# Altium PCB HIVE_SIGHT_PANEL_OLD.PcbDoc
Units mil, origin at the board's own origin, x right, y up, seen from the top; angles counter-clockwise.
Board outline 7000 x 5246.04 mil, 4 copper layers (Top, GND, PWR, Bottom), stack 60.394 mil thick; 8 components, 55 nets, 6 pads, 0 vias.
Unrouted connection lines stored in the file: 24.
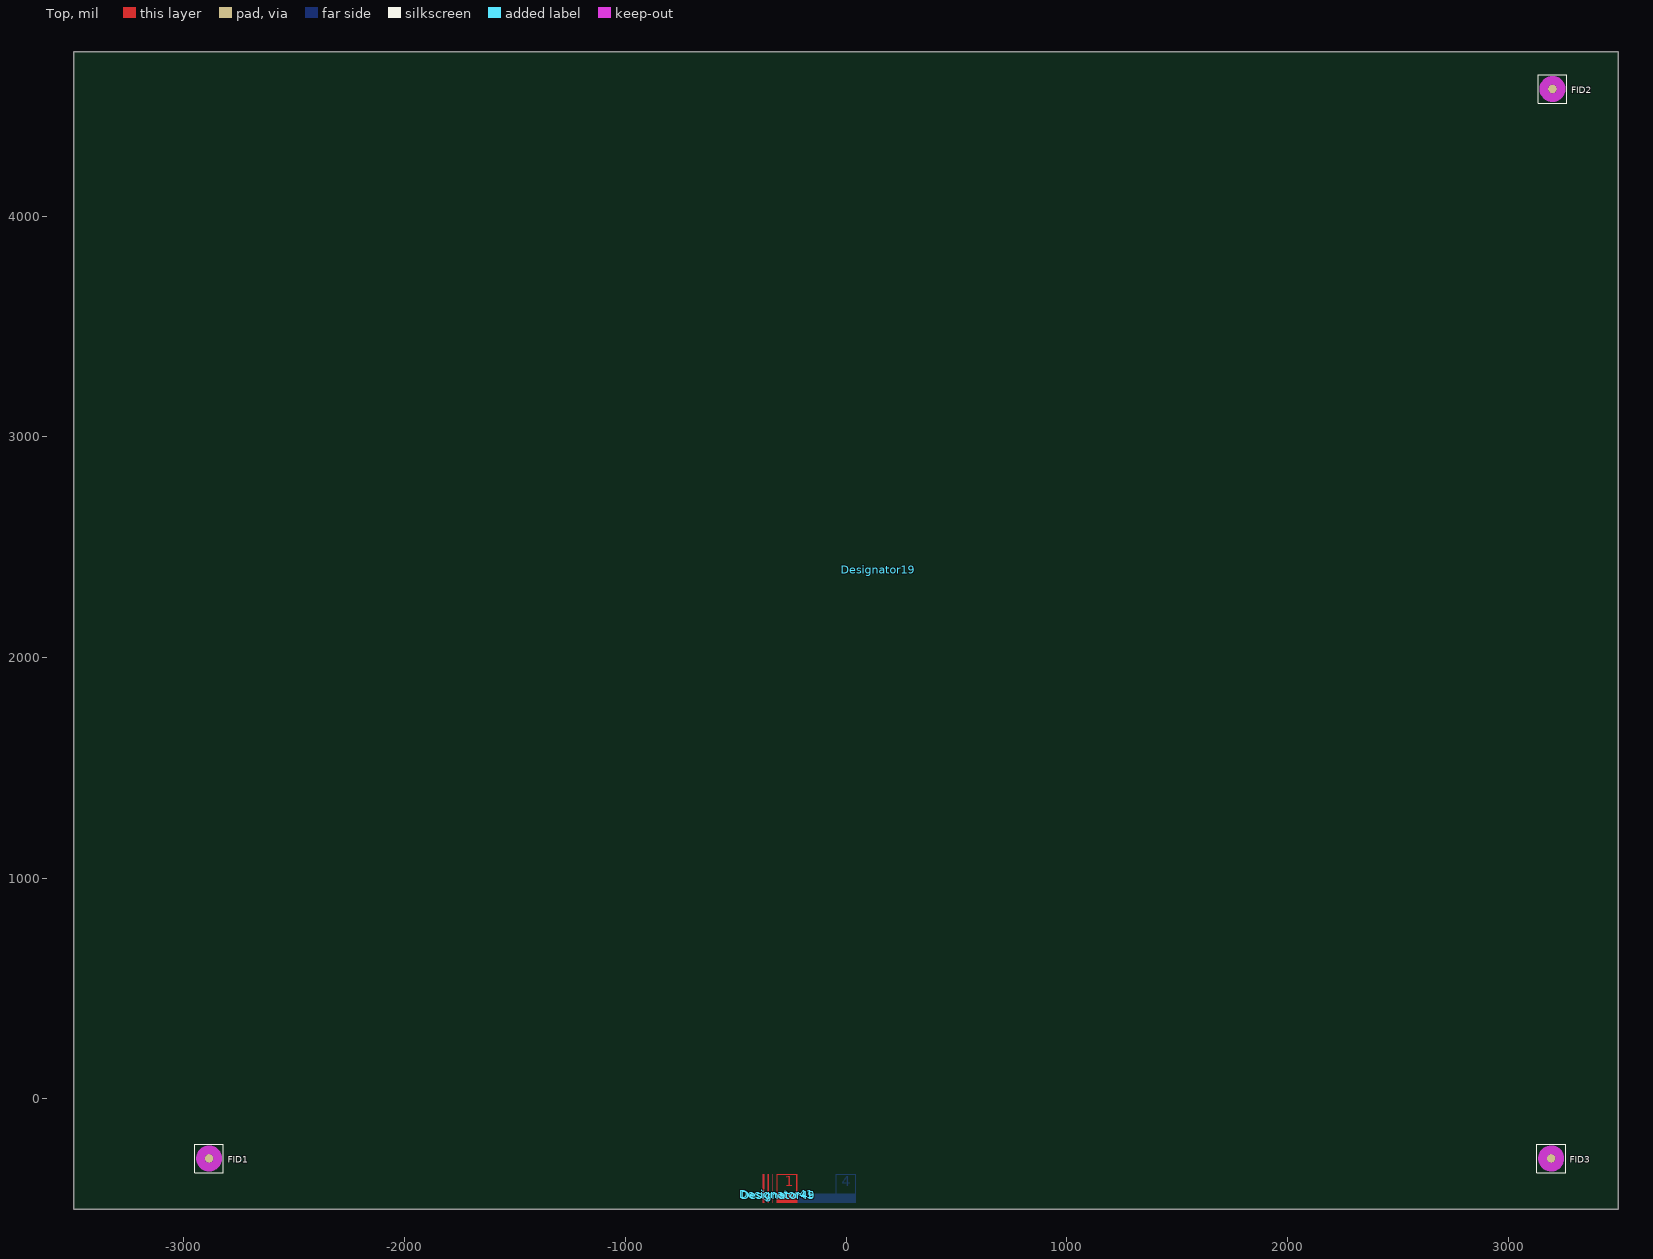
[diagram p0: Top view]
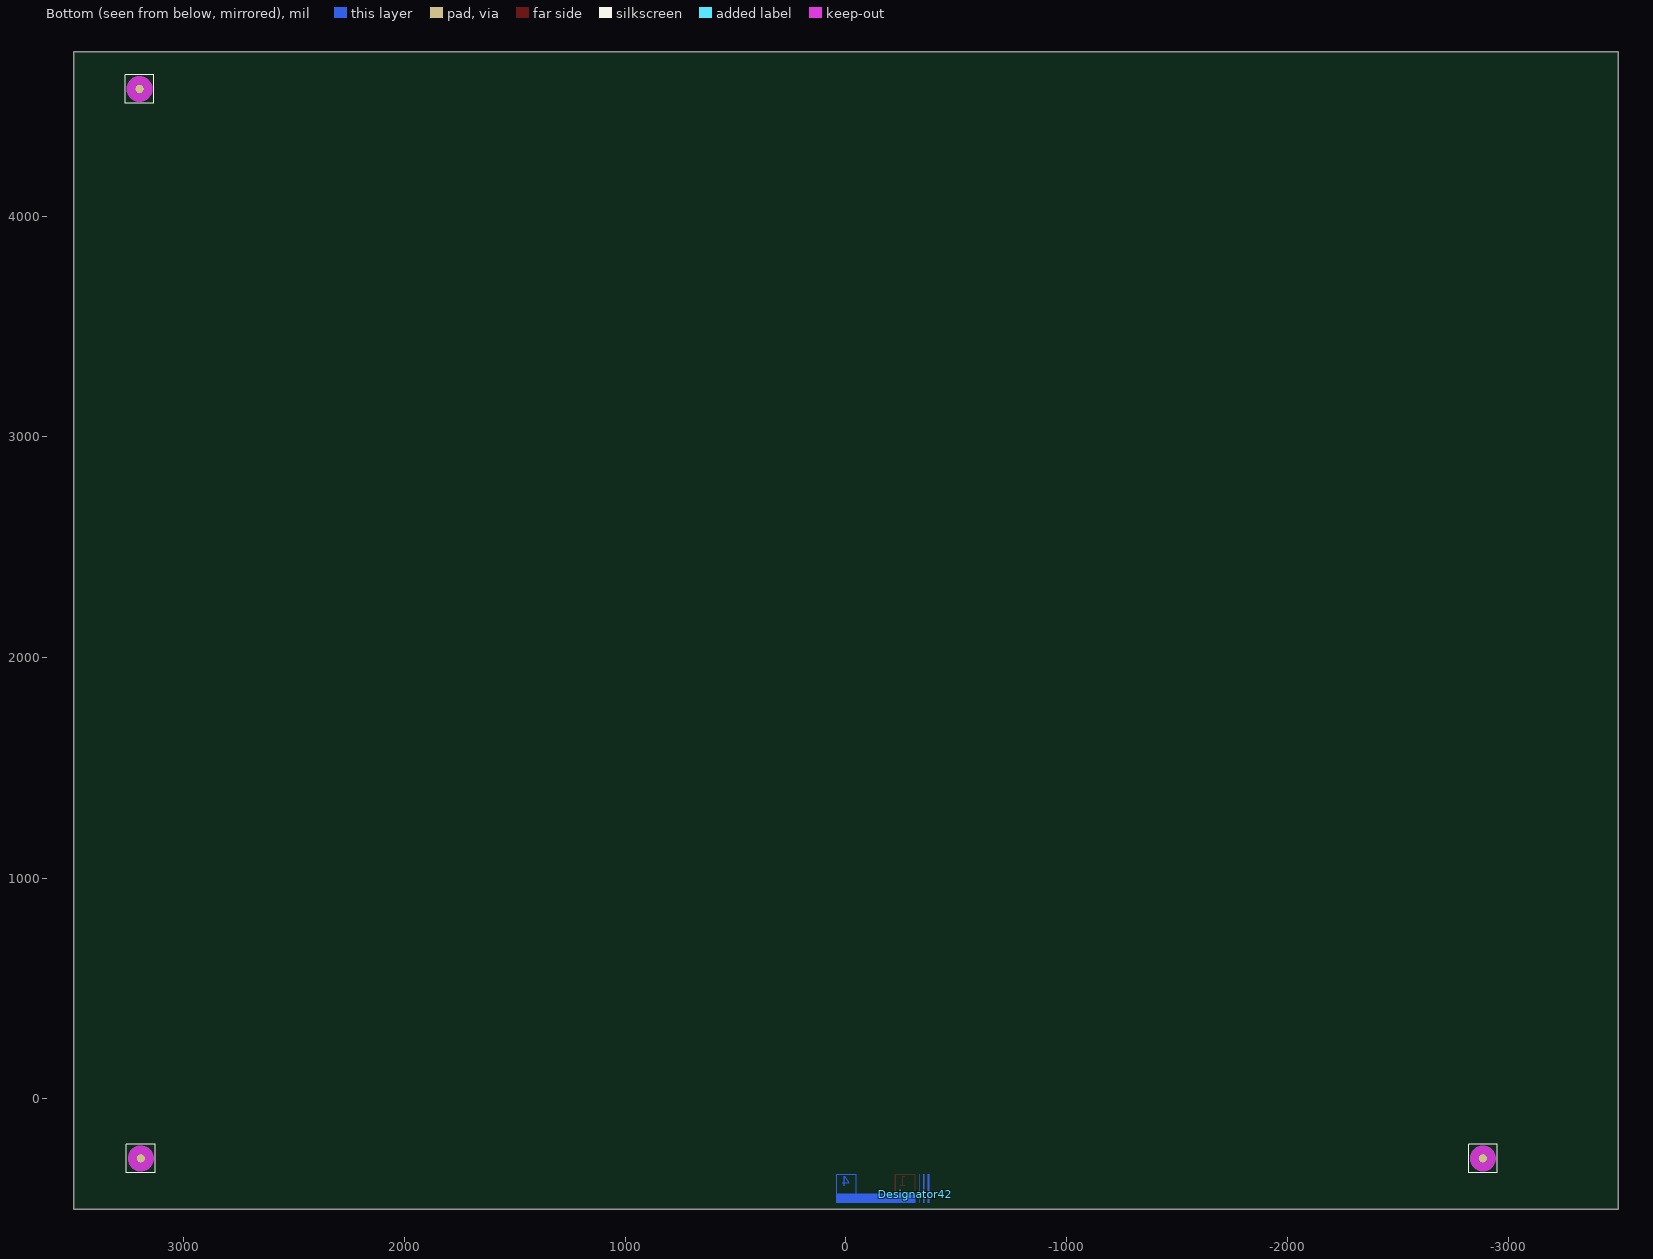
[diagram p1: Bottom view, seen from below]
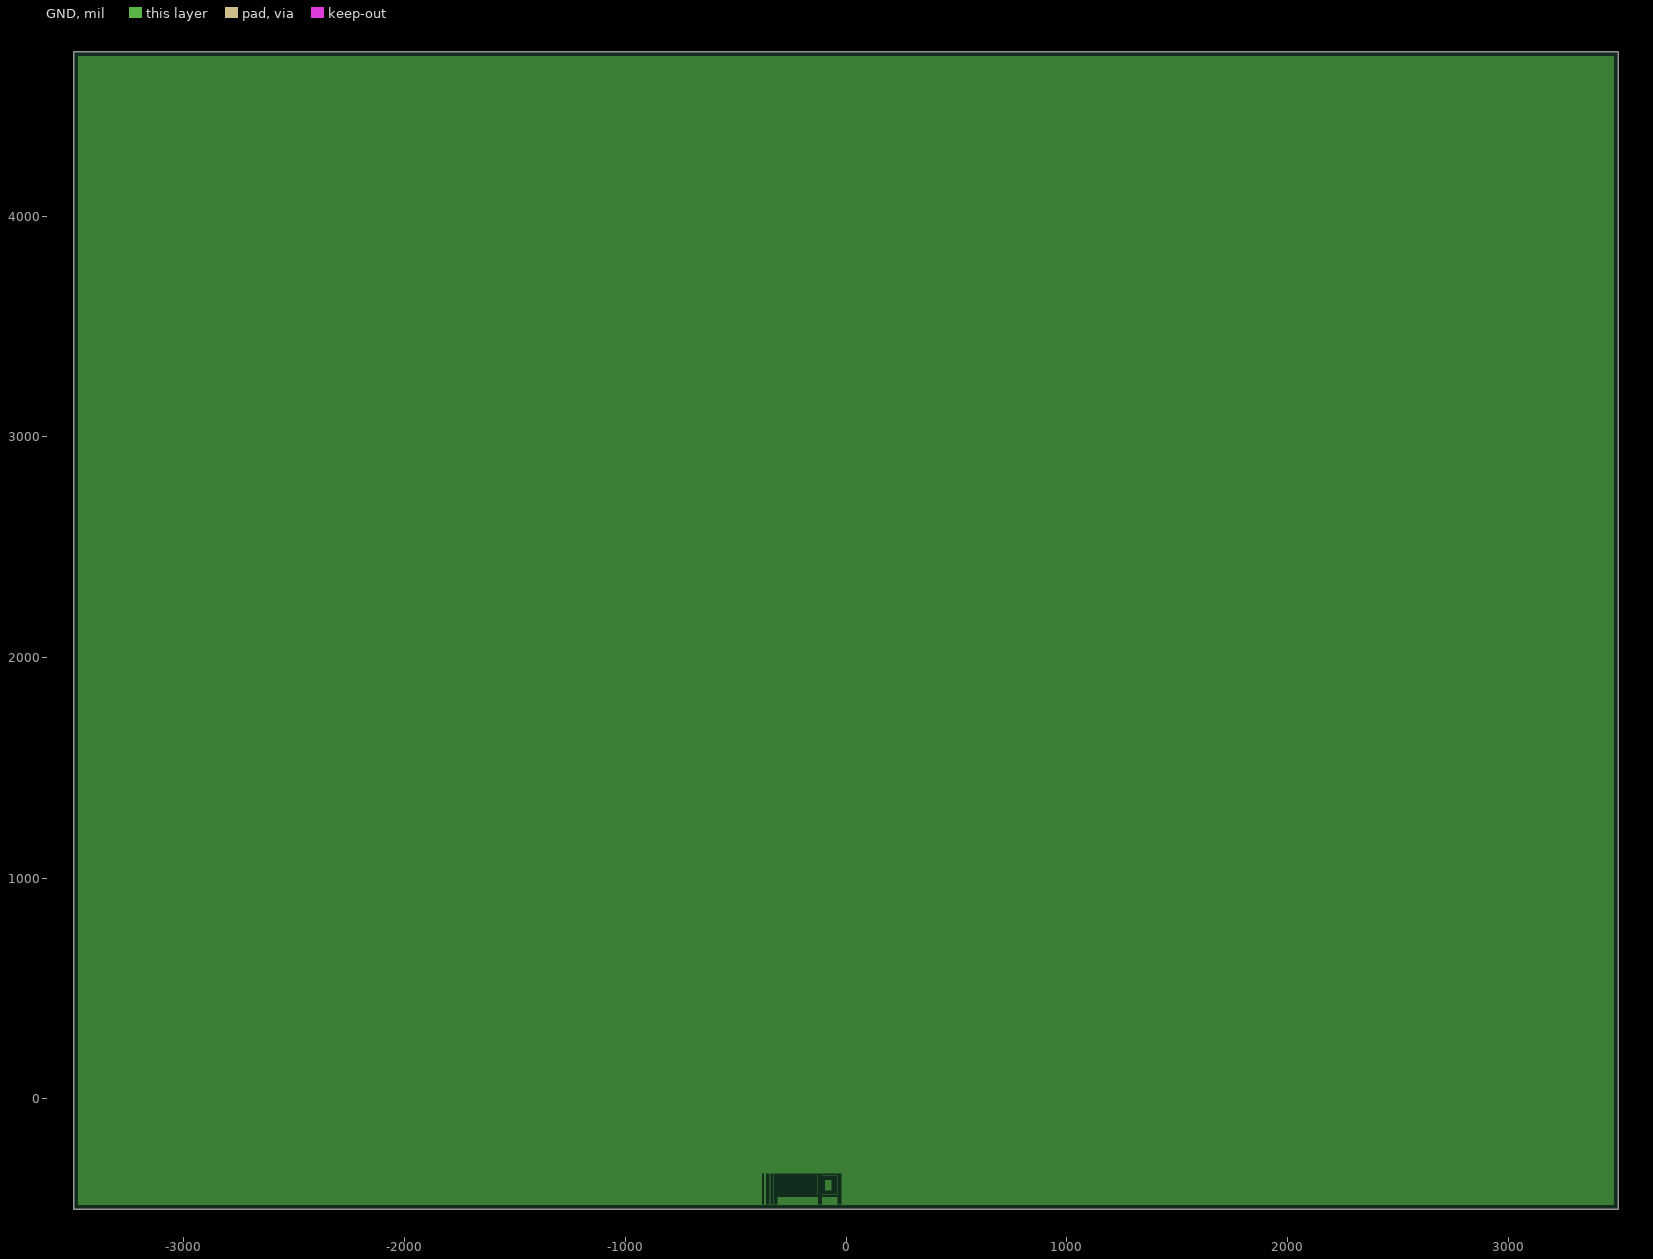
[diagram p2: GND, clearances drawn from the general rule]
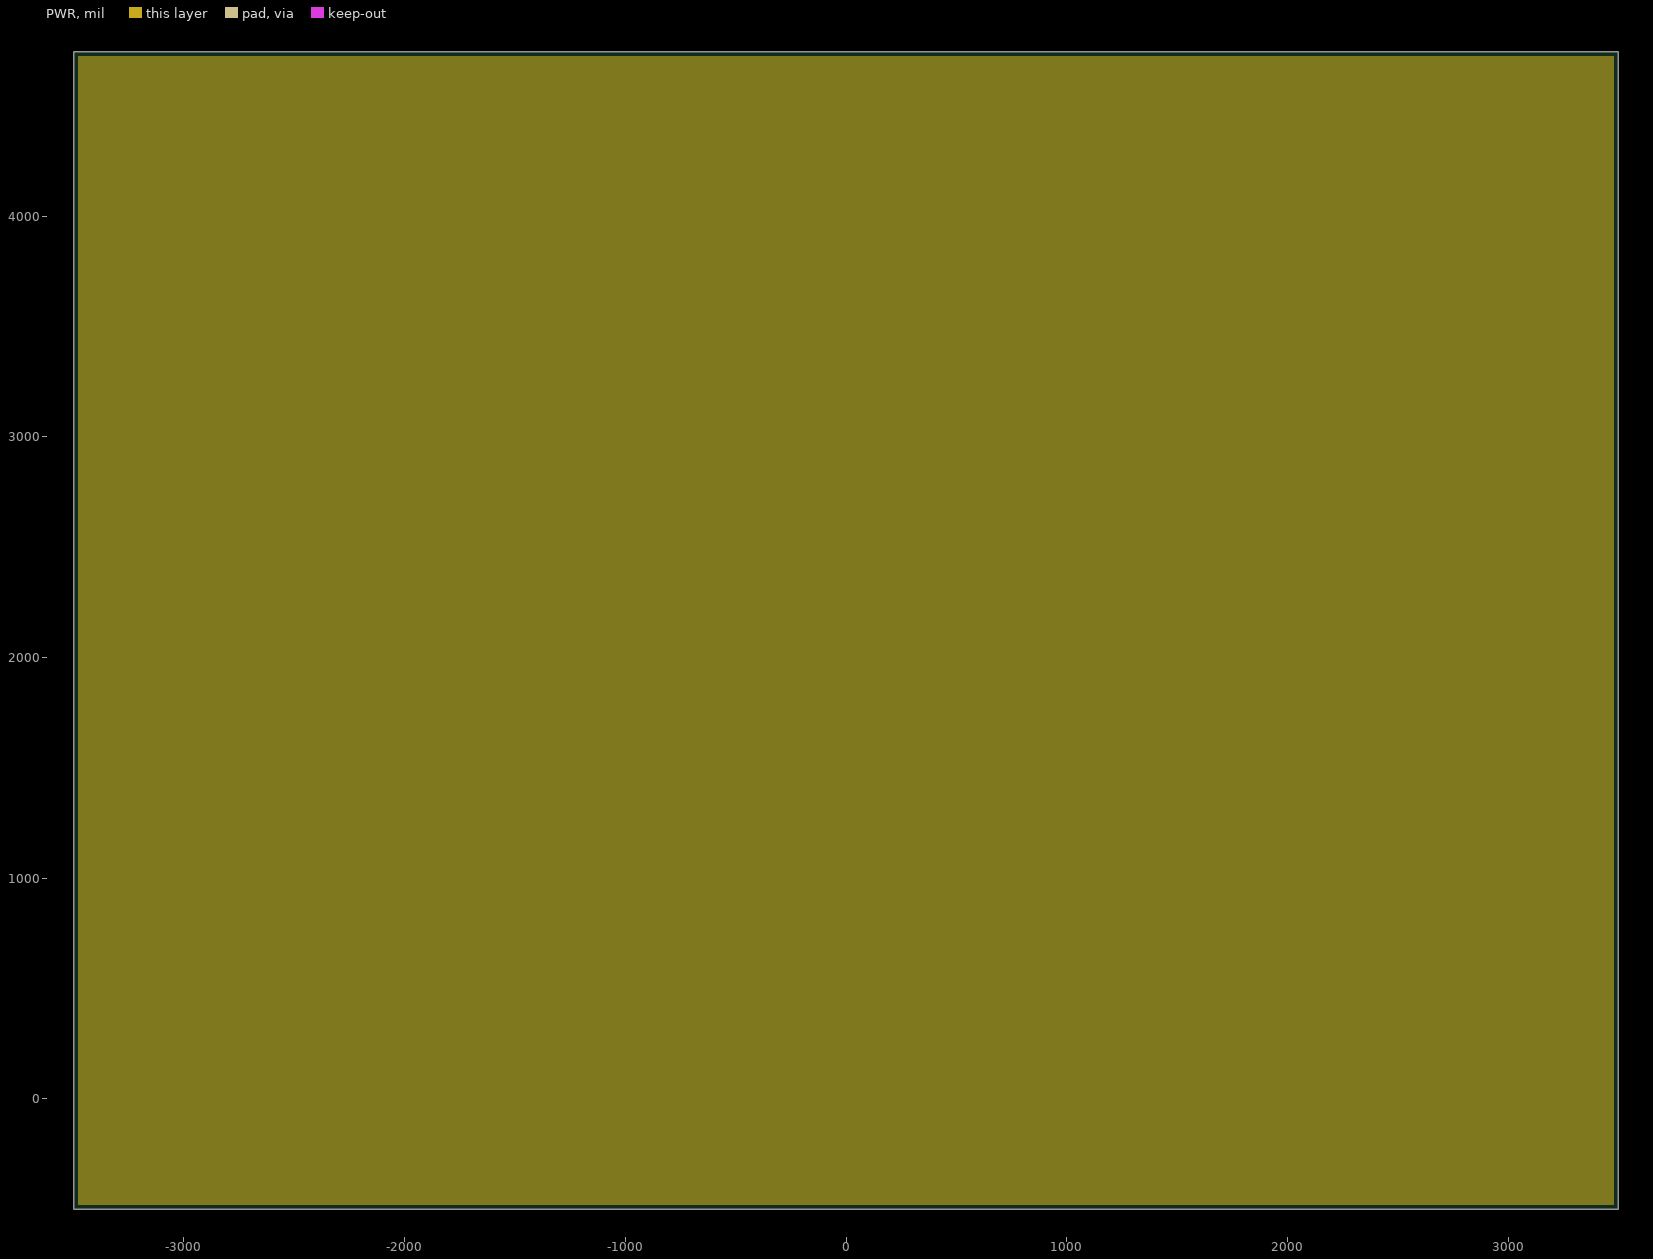
[diagram p3: PWR, clearances drawn from the general rule]

## Layer stack, top to bottom
Top Solder: solder mask 1.2205, Dk 3.5
Top: signal copper 1.378
Dielectric 1: prepreg 4.803, Dk 4.1
GND: plane copper 1.378, net GND
Dielectric 2: core 45.276, Dk 4.1
PWR: plane copper 1.378, net GND
Dielectric 3: prepreg 4.803, Dk 4.1
Bottom: signal copper 1.378
Bottom Solder: solder mask 0.394, Solder Resist, Dk 3.5

## Board outline
-3500,-500 3500,-500 3500,4746.04 -3500,4746.04

## Design rules (kind name [scope] priority, off if disabled: settings)
BoardOutlineClearance BoardOutlineClearance-Silk [(OnLayer('Bottom Overlay')) OR (OnLayer('Top Overlay'))] p1: gap=0 ignorepadtopadclearanceinfootprint=FALSE
BoardOutlineClearance BoardOutlineClearance-MouseBites [InComponentClass('MouseBites')] p2: gap=10 ignorepadtopadclearanceinfootprint=FALSE except(0: Arc-SplitContinuation Track-SplitContinuation SMDPad-SplitContinuation THPad-OutlineEdge THPad-CavityEdge THPad-CutoutEdge THPad-SplitBarrior THPad-SplitContinuation Via-SplitContinuation Fill-SplitContinuation Poly-SplitContinuation Region-OutlineEdge Region-CavityEdge Region-CutoutEdge Region-SplitBarrior Region-SplitContinuation Text-SplitContinuation; 20: Arc-OutlineEdge Track-OutlineEdge SMDPad-OutlineEdge Via-OutlineEdge Fill-OutlineEdge Poly-OutlineEdge Text-OutlineEdge)
BoardOutlineClearance BoardOutlineClearance-EdgePlating [InPolygonClass('EdgePlatingPolygon')] p3: gap=0 ignorepadtopadclearanceinfootprint=FALSE
BoardOutlineClearance [All] p4: gap=10 ignorepadtopadclearanceinfootprint=FALSE except(0: Arc-SplitContinuation Track-SplitContinuation SMDPad-SplitContinuation THPad-SplitContinuation Via-SplitContinuation Fill-SplitContinuation Poly-SplitContinuation Region-SplitContinuation Text-SplitContinuation; 15: THPad-OutlineEdge; 20: Arc-OutlineEdge Track-OutlineEdge SMDPad-OutlineEdge Via-OutlineEdge Fill-OutlineEdge Poly-OutlineEdge Region-OutlineEdge Text-OutlineEdge)
Clearance HV-Header [(TouchesRoom('SB_HDR_HV_1') OR TouchesRoom('SB_HDR_HV_2') OR TouchesRoom('DB_HDR_HV_1') OR TouchesRoom('DB_HDR_HV_2') OR TouchesRoom('DB_HDR_HV_3') OR TouchesRoom('DB_HDR_HV_4')) AND OnTopLayer] p1: gap=7.87 ignorepadtopadclearanceinfootprint=FALSE
Clearance HV-External [InNetClass('HV') vs OnOutside] p2: gap=32 ignorepadtopadclearanceinfootprint=FALSE
Clearance HV-Internal [InNetClass('HV') vs OnMid] p3: gap=10 ignorepadtopadclearanceinfootprint=FALSE
Clearance 250V-External [InNet('-HV_MID') vs OnOutside] p4: gap=16 ignorepadtopadclearanceinfootprint=FALSE
Clearance 250V-Internal [InNet('-HV_MID') vs OnMid] p5: gap=8 ignorepadtopadclearanceinfootprint=FALSE
Clearance [All] p6: gap=5 ignorepadtopadclearanceinfootprint=FALSE
Clearance DiffPair [InNetClass('HighSpeedDiff')] p7: gap=12 ignorepadtopadclearanceinfootprint=FALSE except(5: Arc-Via Track-Via)
Clearance DiffPair_Same [InNetClass('HighSpeedDiff') vs InNetClass('HighSpeedDiff')] p8 off: gap=12 ignorepadtopadclearanceinfootprint=FALSE except(5: Arc-Via Track-Via)
ComponentClearance "Schematic Power Plane Clearance" [InComponent('MB1')] p1: gap=0 collisioncheckmode=3 verticalgap=0 showdistances=FALSE
ComponentClearance "Schematic Power Plane Clearance_1" [InComponent('MB2')] p2: gap=0 collisioncheckmode=3 verticalgap=0 showdistances=FALSE
ComponentClearance "Schematic Power Plane Clearance_2" [InComponent('MB3')] p3: gap=0 collisioncheckmode=3 verticalgap=0 showdistances=FALSE
ComponentClearance [All] p4: gap=4 collisioncheckmode=3 verticalgap=4 showdistances=FALSE
DiffPairsRouting [All] p1: maxlimit=8 minlimit=8 mostfreqgap=8 toplayer_minwidth=6 toplayer_maxwidth=6 toplayer_prefwidth=6 bottomlayer_minwidth=6 bottomlayer_maxwidth=6 bottomlayer_prefwidth=6 maxuncoupledlength=500
HoleSize [All] p1: absolutevalues=TRUE maxlimit=1000 minlimit=4 maxpercent=80.000 minpercent=20.000
HoleToHoleClearance [All] p1: gap=5 allowstackedmicrovias=TRUE
MatchedLengths DiffMatching_WithinPair [InDifferentialPairClass('All Differential Pairs')] p1: tolerance=1 checknetsindiffpair=TRUE checkdiffpairvsdiffpair=FALSE checkxsignals=FALSE checkothers=FALSE
MatchedLengths DiffMatching [InDifferentialPairClass('All Differential Pairs')] p2: tolerance=1 checknetsindiffpair=FALSE checkdiffpairvsdiffpair=TRUE checkxsignals=TRUE checkothers=TRUE
MinimumSolderMaskSliver [All] p1: minsoldermaskwidth=3.9
PlaneClearance [All] p1: clearance=6
PlaneConnect [All] p1: pad.planeconnectstyle=Relief pad.reliefexpansion=20 pad.reliefentries=4 pad.reliefconductorwidth=10 pad.reliefairgap=10 via.planeconnectstyle=Direct via.reliefexpansion=20 via.reliefentries=4 via.reliefconductorwidth=10 via.reliefairgap=10
PolygonConnect [All] p1: thpad.connectstyle=Relief thpad.reliefconductorwidth=10 thpad.reliefentries=4 thpad.polygonreliefangle="90 Angle" thpad.airgapwidth=10 smdpad.connectstyle=Direct smdpad.reliefconductorwidth=10 smdpad.reliefentries=4 smdpad.polygonreliefangle="90 Angle" smdpad.airgapwidth=10 via.connectstyle=Direct via.reliefconductorwidth=10 via.reliefentries=4 via.polygonreliefangle="90 Angle" via.airgapwidth=10
RoutingVias [All] p1: holewidth=10 width=18 viastyle="Through Hole" minholewidth=10 minwidth=18 maxholewidth=10 maxwidth=30
SilkToSilkClearance [All] p1: silktosilkclearance=1
SilkToSolderMaskClearance [IsPad] p1: minsilkscreentomaskgap=1.35 clearancetoexposedcopper=FALSE
SolderMaskExpansion [All] p1: expansion=2 istentingtop=FALSE
Width [All] p1: maxlimit=1000 minlimit=4 preferedwidth=6
21 further rules are at their usual default settings.

## Classes and differential pairs
net class HighSpeedDiff: M1_CLK_N M1_CLK_P M1_CMD_IN_N M1_CMD_IN_P M1_CMD_OUT_N M1_CMD_OUT_P M1_HSL_N M1_HSL_P M1_SYNC_N M1_SYNC_P M2_CLK_N M2_CLK_P M2_CMD_IN_N M2_CMD_IN_P M2_CMD_OUT_N M2_CMD_OUT_P M2_HSL_N M2_HSL_P M2_SYNC_N M2_SYNC_P
net class HV: -HV M1_SOURCE_-HV_A M1_SOURCE_-HV_B M2_SOURCE_-HV_A M2_SOURCE_-HV_B
differential pair M2_SYNC: +M2_SYNC_P -M2_SYNC_N
differential pair M2_HSL: +M2_HSL_P -M2_HSL_N
differential pair M2_CMD_OUT: +M2_CMD_OUT_P -M2_CMD_OUT_N
differential pair M2_CMD_IN: +M2_CMD_IN_P -M2_CMD_IN_N
differential pair M2_CLK: +M2_CLK_P -M2_CLK_N
differential pair M1_SYNC: +M1_SYNC_P -M1_SYNC_N
differential pair M1_HSL: +M1_HSL_P -M1_HSL_N
differential pair M1_CMD_OUT: +M1_CMD_OUT_P -M1_CMD_OUT_N
differential pair M1_CMD_IN: +M1_CMD_IN_P -M1_CMD_IN_N
differential pair M1_CLK: +M1_CLK_P -M1_CLK_N

## Components (designator, comment, footprint, x,y, rotation, side; value= is the part's Value field where it differs from the comment)
Designator19 "Comment" STN_STENCIL_TOP_FRAMEWORK_420X520MM 146.97,2398.02 r0 top
Designator41 "Comment" LYR-MARKER-SIGNAL-1 -314.38,-432.4 r0 top
Designator42 "Comment" LYR-MARKER-SIGNAL-4 -314.38,-432.4 r0 bottom
Designator45 "Comment" LYR-MARKER-PLANE-2 -307.57,-437.32 r0 top
Designator49 "Comment" LYR-MARKER-PLANE-3 -307.57,-437.32 r0 top
FID1 "Comment" "FID_CIRCLE_1MM - PASTE_MASK" -2886.14,-269.42 r180 top
FID2 "Comment" "FID_CIRCLE_1MM - PASTE_MASK" 3201.16,4576.59 r180 top
FID3 "Comment" "FID_CIRCLE_1MM - PASTE_MASK" 3195.49,-269.42 r180 top

## Footprints (in the part's own frame and the unit in brackets; to place one, negate y for a bottom-side part, rotate by r counter-clockwise, add the part's x,y. Pads: shape width x height; smd on the part's side, far side on the other; paste and mask are expansions set on the pad)
"FID_CIRCLE_1MM - PASTE_MASK" [mm]
  round 1 smd paste-1 mask+1: 1(0,0)
  round 1 smd far side paste-1 mask+1: 2(0,0)
  Top keep-out circle w1: c0,0 r1
  Bottom keep-out circle w1: c0,0 r1
  silkscreen extent -1.65,-1.65 1.65,1.65
LYR-MARKER-PLANE-2 [mil]
  GND region: 187.01,-4.92 187.01,0 83.66,0 83.66,-4.92
  GND region: 83.66,-4.92 88.58,-4.92 88.58,98.43 83.66,98.43
  GND region: 93.5,21.73 93.5,4.92 177.16,4.92 177.16,21.73
  GND region: 177.17,72.06 177.17,88.58 93.5,88.58 93.5,72.06
  GND region: 93.5,4.92 122.18,4.92 122.18,88.58 93.5,88.58
  GND region: 187.01,93.5 187.01,98.43 83.66,98.43 83.66,93.5
  GND region: 182.09,-39.37 196.85,-39.37 196.85,98.43 182.09,98.43
  GND region: -4.92,-4.92 88.58,-4.92 88.58,98.43 -4.92,98.43
  GND region: -17.68,-39.37 -4.92,-39.37 -4.92,98.42 -17.68,98.42
  GND region: -34.4,-39.37 -21.68,-39.37 -21.68,98.42 -34.4,98.42
  GND region: -54.06,-39.37 -40.4,-39.37 -40.4,98.42 -54.06,98.42
  GND region: -70.87,-39.37 -64.06,-39.37 -64.06,98.42 -70.87,98.42
  GND region: 177.17,88.58 154.46,88.58 154.46,4.92 177.17,4.92
LYR-MARKER-PLANE-3 [mil]
  GND region: 270.67,-39.37 285.43,-39.37 285.43,98.43 270.67,98.43
  GND region: 172.24,-4.92 177.17,-4.92 177.17,98.43 172.24,98.43
  GND region: 83.66,-4.92 88.58,-4.92 88.58,98.43 83.66,98.43
  GND region: 275.59,93.5 275.59,98.43 172.24,98.43 172.24,93.5
  GND region: 182.09,4.92 210.85,4.92 210.85,88.58 182.09,88.58
  GND region: 265.75,72.06 265.75,88.58 182.09,88.58 182.09,72.06
  GND region: 265.75,88.58 243.65,88.58 243.65,4.92 265.75,4.92
  GND region: 182.09,21.73 182.09,4.92 265.75,4.92 265.75,21.73
  GND region: 275.59,-4.92 275.59,0 172.24,0 172.24,-4.92
  GND region: -4.92,-4.92 173.21,-4.92 173.21,98.43 -4.92,98.43
  GND region: -70.87,-39.37 -64.06,-39.37 -64.06,98.42 -70.87,98.42
  GND region: -54.06,-39.37 -40.4,-39.37 -40.4,98.42 -54.06,98.42
  GND region: -34.4,-39.37 -21.68,-39.37 -21.68,98.42 -34.4,98.42
  GND region: -17.68,-39.37 -4.92,-39.37 -4.92,98.42 -17.68,98.42
LYR-MARKER-SIGNAL-1 [mil]
  Top region: 88.58,0 93.5,0 93.5,93.5 88.58,93.5
  Top region: 0,4.92 0,-39.37 93.5,-39.37 93.5,4.92
  Top region: 93.5,93.5 88.58,93.5 88.58,0 93.5,0
  Top region: 93.5,88.58 93.5,93.5 0,93.5 0,88.58
  Top region: 0,0 4.92,0 4.92,93.5 0,93.5
  Top region: -64.06,-39.37 -54.06,-39.37 -54.06,93.5 -64.06,93.5
  Top region: -40.4,-39.37 -34.4,-39.37 -34.4,93.5 -40.4,93.5
  Top region: -21.68,-39.37 -17.68,-39.37 -17.68,93.5 -21.68,93.5
  Top pour cut-out: -74.8,98.43 -74.8,-39.37 98.42,-39.37 98.43,98.43
LYR-MARKER-SIGNAL-4 [mil]
  Top region: -64.05,39.37 -54.05,39.37 -54.05,-93.5 -64.05,-93.5
  Top region: -40.4,39.37 -34.4,39.37 -34.4,-93.5 -40.4,-93.5
  Top region: -21.68,39.37 -17.68,39.37 -17.68,-93.5 -21.68,-93.5
  Top region: 270.67,-93.5 265.75,-93.5 265.75,0 270.67,0
  Top region: 0,-4.92 0,39.37 359.25,39.37 359.25,-4.92
  Top region: 359.25,-93.5 354.33,-93.5 354.33,0 359.25,0
  Top region: 359.25,-88.58 359.25,-93.5 265.75,-93.5 265.75,-88.58
  Top region: 354.33,0 359.25,0 359.25,-93.5 354.33,-93.5
  Top pour cut-out: -70.87,-98.43 -70.87,39.37 364.17,39.37 364.17,-98.43
STN_STENCIL_TOP_FRAMEWORK_420X520MM [mil] "MEC - STENCIL PASTE FRAMEWORK"
  body extent -10236,-8268 -10157,-8189

## Nets (pads, with @x,y where several pads share a name; then routed paths per layer and width w, separated by ;. In a path a pad name is that pad's centre, name@x,y a point inside that pad or via, vN(x,y) a via of type N, cw(c..) or ccw(c..) an arc to the next point about the centre after c; other vN are vias at no path point)
2V5: 
-HV: 
-HV_MID: 
ADAPTER_BOARD_ID: 
GND: 
M1_1V8_A_LDO_IN: 
M1_1V8_A_LDO_OUT: 
M1_1V8_ANALOG: 
M1_1V8_D_LDO_IN: 
M1_1V8_D_LDO_OUT: 
M1_1V8_DIGITAL: 
M1_CLK_N: 
M1_CLK_P: 
M1_CMD_IN_N: 
M1_CMD_IN_P: 
M1_CMD_OUT_N: 
M1_CMD_OUT_P: 
M1_DRAIN_PI_A: 
M1_DRAIN_PI_B: 
M1_GRILLE_PI_A: 
M1_GRILLE_PI_B: 
M1_HSL_N: 
M1_HSL_P: 
M1_RST: 
M1_SORTIE_PI_A: 
M1_SORTIE_PI_B: 
M1_SOURCE_-HV_A: 
M1_SOURCE_-HV_B: 
M1_SYNC_N: 
M1_SYNC_P: 
M2_1V8_A_LDO_IN: 
M2_1V8_A_LDO_OUT: 
M2_1V8_ANALOG: 
M2_1V8_D_LDO_IN: 
M2_1V8_D_LDO_OUT: 
M2_1V8_DIGITAL: 
M2_CLK_N: 
M2_CLK_P: 
M2_CMD_IN_N: 
M2_CMD_IN_P: 
M2_CMD_OUT_N: 
M2_CMD_OUT_P: 
M2_DRAIN_PI_A: 
M2_DRAIN_PI_B: 
M2_GRILLE_PI_A: 
M2_GRILLE_PI_B: 
M2_HSL_N: 
M2_HSL_P: 
M2_RST: 
M2_SORTIE_PI_A: 
M2_SORTIE_PI_B: 
M2_SOURCE_-HV_A: 
M2_SOURCE_-HV_B: 
M2_SYNC_N: 
M2_SYNC_P: 
pads on no net: FID1.1 FID1.2 FID2.1 FID2.2 FID3.1 FID3.2

## Polygon pours and split planes (outlines as drawn)
M2_SOURCE_-HV_B on Top "Top-M2_SOURCE_-HV_B 1" (solid, pour order 86): 804.43,744.95
no net on Top "Top-No Net" (solid, pour order 50): 1172.15,1708.94
no net on Top "Top-No Net 1" (solid, pour order 44): 1144.62,1731.39
no net on Top "Top-No Net 2" (solid, pour order 42): 1152.12,1746.17
no net on Top "Top-No Net 3" (solid, pour order 40): 1148.4,1730.43
no net on Top "Top-No Net 4" (solid, pour order 38): 1253.54,2169.25
no net on Top "Top-No Net 5" (solid, pour order 36): 1257.26,2184.99
no net on Top "Top-No Net 6" (solid, pour order 34): 1249.76,2170.21
no net on Top "Top-No Net 7" (solid, pour order 28): 1277.29,2147.76
no net on Top "Top-No Net 8" (solid, pour order 22): 1277.29,1708.94
no net on Top "Top-No Net 9" (solid, pour order 14): 1249.76,1731.39
no net on Top "Top-No Net 10" (solid, pour order 8): 1257.26,1746.17
no net on Top "Top-No Net 11" (solid, pour order 2): 1253.54,1730.43
no net on Top "Top-No Net 12" (solid, pour order 0): -905.31,-122.26
GND on GND (split plane): -125.48,-415.59 -125.48,-432.4 -125.48,-437.32 -130.4,-437.32 -130.4,-432.4 -130.4,-348.74 -130.4,-343.81 -125.48,-343.81
GND on GND (split plane): -36.9,-437.32 -110.72,-437.32 -110.72,-432.4 -41.82,-432.4 -41.82,-348.74 -110.72,-348.74 -110.72,-343.81 -36.9,-343.81
GND on GND (split plane): 3479.9,-479.9 -3479.9,-479.9 -3479.9,4725.94 3479.9,4725.94
GND on PWR (split plane): 3479.9,-479.9 -3479.9,-479.9 -3479.9,4725.94 3479.9,4725.94

## Other copper
Top:
  text "LAYER 1: TOP" at 10897.52,5333.21 h100
Bottom:
  text "LAYER 8: BOTTOM" at 10897.52,4136.93 h100
GND (plane layer: these items are gaps in the copper):
  text "LAYER 2: GND1" at 10897.52,5162.31 h100
PWR (plane layer: these items are gaps in the copper):
  text "LAYER 6: GND3" at 10897.52,4478.72 h100

## Silkscreen, mask and mechanical layers (free items; w line width, h text height)
Top Overlay:
  text "TOP SILKSCREEN" at 10897.52,5675 h100
Bottom Overlay:
  text "BOTTOM SILKSCREEN" at 10897.52,3795.14 h100
Top Paste:
  text "TOP PASTEMASK" at 10897.52,2402.64 h100
Bottom Paste:
  text "BOTTOM PASTEMASK" at 10897.52,1354.98 h100
Top Solder:
  text "TOP SOLDERMASK" at 10897.52,5504.1 h100
Bottom Solder:
  text "BOTTOM SOLDERMASK" at 10897.52,3966.04 h100
Top Assembly:
  text "TOP ASSEMBLY" at 10897.52,2228.85 h100
Bottom Assembly:
  text "BOTTOM ASSEMBLY" at 10897.52,1186.51 h100
Top Designators:
  text "TOP DESIGNATORS" at 10897.52,2060.38 h100
Bottom Designators:
  text "BOTTOM DESIGNATORS" at 10897.52,849.57 h100
Board Outline:
  text "BOARD OUTLINE" at 10897.52,3371.19 h100
Panel Outline:
  the board outline again, w5
  text "PANEL OUTLINE" at 10897.52,3202.72 h100
Route Tool Path:
  lines w100: -475,-500 475,-500
  text "100 MIL ROUTER" at -4152.61,3899.19 h78.74
  text "100 MIL ROUTER" at 3563.92,3896.69 h78.74
  text "ROUTE TOOL PATH" at 10897.52,3034.25 h100
  text "100 MIL ROUTER" at 3576.84,213.49 h78.74
  text "100 MIL ROUTER" at -4201.92,144.59 h78.74
Panel V-Grove:
  lines w5: -3750,0 3750,0 ; -3750,4246.04 3750,4246.04
  text "V-GROOVE" at 3839.85,4189.61 h78.74
  text "V-GROOVE" at -4426.76,4188.23 h78.74
  text "PANEL V-GROOVE" at 10897.52,2865.78 h100
  text "V-GROOVE" at 3845.84,-42 h78.74
  text "V-GROOVE" at -4420.76,-43.38 h78.74
Manufacturing Notes:
  text "MANUFACTURING NOTES" at 10897.52,512.64 h100
Top 3D Models:
  text "TOP 3D MODELS" at 10897.52,1723.44 h100
Bottom 3D Models:
  text "BOTTOM 3D MODELS" at 10897.52,681.1 h100
Top Courtyard:
  text "TOP COURTYARD" at 10897.52,1891.91 h100
Bottom Courtyard:
  text "BOTTOM COURTYARD" at 10897.52,1018.04 h100
Drill Drawing:
  drawing of 152 lines, arcs and shapes, not listed
  text "Symbol" at 13310.53,2742.63 h72
  text "Count" at 13816.41,2742.63 h72
  text "Hole Size" at 14466.23,2742.63 h72
  text "Plated" at 15675.88,2742.63 h72
  text "Hole Type" at 16181.75,2742.63 h72
  text "Drill Layer Pair" at 16915.55,2742.63 h72
  text "Via/Pad" at 18105.21,2742.63 h72
  text "Pad Shape" at 18695.06,2742.63 h72
  text "DRILL DRAWING" at 10897.52,2717.67 h100
  text "4" at 13816.41,2592.63 h60
  text "19.685mil (0.500mm)" at 14466.23,2592.63 h60
  text "PTH" at 15675.88,2592.63 h60
  text "Slot" at 16181.75,2592.63 h60
  text "Top - Bottom" at 16915.55,2592.63 h60
  text "Pad" at 18105.21,2592.63 h60
  text "Rounded Rectangle" at 18695.06,2592.63 h60
  text "4" at 13816.41,2442.63 h60
  text "21.654mil (0.550mm)" at 14466.23,2442.63 h60
  text "PTH" at 15675.88,2442.63 h60
  text "Slot" at 16181.75,2442.63 h60
  text "Top - Bottom" at 16915.55,2442.63 h60
  text "Pad" at 18105.21,2442.63 h60
  text "Rounded Rectangle" at 18695.06,2442.63 h60
  text "4" at 13816.41,2292.63 h60
  text "40.000mil (1.016mm)" at 14466.23,2292.63 h60
  text "PTH" at 15675.88,2292.63 h60
  text "Round" at 16181.75,2292.63 h60
  text "Top - Bottom" at 16915.55,2292.63 h60
  text "Pad" at 18105.21,2292.63 h60
  text "(Mixed)" at 18695.06,2292.63 h60
  text "4" at 13816.41,2142.63 h60
  text "51.181mil (1.300mm)" at 14466.23,2142.63 h60
  text "PTH" at 15675.88,2142.63 h60
  text "Round" at 16181.75,2142.63 h60
  text "Top - Bottom" at 16915.55,2142.63 h60
  text "Pad" at 18105.21,2142.63 h60
  text "(Mixed)" at 18695.06,2142.63 h60
  text "4" at 13816.41,1992.63 h60
  text "70.866mil (1.800mm)" at 14466.23,1992.63 h60
  text "PTH" at 15675.88,1992.63 h60
  text "Round" at 16181.75,1992.63 h60
  text "Top - Bottom" at 16915.55,1992.63 h60
  text "Pad" at 18105.21,1992.63 h60
  text "Rounded" at 18695.06,1992.63 h60
  text "10" at 13816.41,1842.63 h60
  text "125.984mil (3.200mm)" at 14466.23,1842.63 h60
  text "NPTH" at 15675.88,1842.63 h60
  text "Round" at 16181.75,1842.63 h60
  text "Top - Bottom" at 16915.55,1842.63 h60
  text "Pad" at 18105.21,1842.63 h60
  text "Rounded" at 18695.06,1842.63 h60
  text "12" at 13816.41,1692.63 h60
  text "40.157mil (1.020mm)" at 14466.23,1692.63 h60
  text "PTH" at 15675.88,1692.63 h60
  text "Round" at 16181.75,1692.63 h60
  text "Top - Bottom" at 16915.55,1692.63 h60
  text "Pad" at 18105.21,1692.63 h60
  text "(Mixed)" at 18695.06,1692.63 h60
  text "16" at 13816.41,1542.63 h60
  text "62.992mil (1.600mm)" at 14466.23,1542.63 h60
  text "PTH" at 15675.88,1542.63 h60
  text "Round" at 16181.75,1542.63 h60
  text "Top - Bottom" at 16915.55,1542.63 h60
  text "Pad" at 18105.21,1542.63 h60
  text "Rounded" at 18695.06,1542.63 h60
  text "24" at 13816.41,1392.63 h60
  text "42.913mil (1.090mm)" at 14466.23,1392.63 h60
  text "PTH" at 15675.88,1392.63 h60
  text "Round" at 16181.75,1392.63 h60
  text "Top - Bottom" at 16915.55,1392.63 h60
  text "Pad" at 18105.21,1392.63 h60
  text "Rounded" at 18695.06,1392.63 h60
  text "70" at 13816.41,1242.63 h60
  text "10.000mil (0.254mm)" at 14466.23,1242.63 h60
  text "PTH" at 15675.88,1242.63 h60
  text "Round" at 16181.75,1242.63 h60
  text "Top - Bottom" at 16915.55,1242.63 h60
  text "(Mixed)" at 18105.21,1242.63 h60
  text "Rounded" at 18695.06,1242.63 h60
  text "488" at 13816.41,1092.63 h60
  text "39.370mil (1.000mm)" at 14466.23,1092.63 h60
  text "PTH" at 15675.88,1092.63 h60
  text "Round" at 16181.75,1092.63 h60
  text "Top - Bottom" at 16915.55,1092.63 h60
  text "Pad" at 18105.21,1092.63 h60
  text "(Mixed)" at 18695.06,1092.63 h60
  text "728" at 13816.41,942.63 h60
  text "11.811mil (0.300mm)" at 14466.23,942.63 h60
  text "PTH" at 15675.88,942.63 h60
  text "Round" at 16181.75,942.63 h60
  text "Top - Bottom" at 16915.55,942.63 h60
  text "Via" at 18105.21,942.63 h60
  text "Rounded" at 18695.06,942.63 h60
  text "1368 Total" at 13816.41,792.63 h60
  text "Symbol" at 13310.53,742.68 h72
  text "Symbol" at 13310.53,742.68 h72
  text "Symbol" at 13310.53,742.68 h72
  text "Count" at 13816.41,742.68 h72
  text "Count" at 13816.41,742.68 h72
  text "Count" at 13816.41,742.68 h72
  text "Hole Size" at 14250.31,742.68 h72
  text "Hole Size" at 14250.31,742.68 h72
  text "Hole Size" at 14250.31,742.68 h72
  text "Plated" at 14972.11,742.68 h72
  text "Plated" at 14972.11,742.68 h72
  text "Plated" at 14972.11,742.68 h72
  text "Hole Type" at 15477.99,742.68 h72
  text "Hole Type" at 15477.99,742.68 h72
  text "Hole Type" at 15477.99,742.68 h72
  text "Drill Layer Pair" at 16211.79,742.68 h72
  text "Drill Layer Pair" at 16211.79,742.68 h72
  text "Drill Layer Pair" at 16211.79,742.68 h72
  text "Via/Pad" at 17401.44,742.68 h72
  text "Via/Pad" at 17401.44,742.68 h72
  text "Via/Pad" at 17401.44,742.68 h72
  text "Pad Shape" at 17991.29,742.68 h72
  text "Pad Shape" at 17991.29,742.68 h72
  text "Pad Shape" at 17991.29,742.68 h72
  text "Slot definitions :" at 13310.53,647.65 h60
  text "Routed Path Length" at 14343.22,647.65 h60
  text "= Calculated from tool start centre position to tool end centre position." at 15445.89,647.65 h60
  text "Hole Length" at 14343.22,547.68 h60
  text "= Routed Path Length + Tool Size = Slot length as defined in the PCB layout" at 15036.02,547.68 h60

## Panel: embedded boards
"HIVE_SIGHT.PcbDoc" at -2805.91,0, 1 rows x 2 columns, spacing 2500 x 2855.91, rotation 0

## Text inside footprints (layer, text, board x,y; h text height)
Designator19: Top Paste "PCB Revision" at 2146.97,-5701.98 h255; Top Paste "FRAME SIZE - 420 x 520 mm" at -3033.45,8658.51 h255.91; Top Paste "VALID AREA - 240 x 340 mm" at -3133.45,-2941.49 h255.91; Top Paste "PCB Revision" at 5906.97,-1961.98 h35; Top Paste "STENCIL THICKNESS -" at 5716.22,-2046.23 h35; Top Paste "TOP" at 6937.97,-5701.98 h255; Top Paste "STENCIL THICKNESS -" at -2932.17,-4444.78 h255.91; Top Paste "TOP" at 5895,-2208.28 h100; Top Paste "Half-Etched  / Lasered Text / DO NOT REMOVE" at 6947.22,-3127.23 h150
Designator41: Top "1" at -277.96,-410.74 h78.74; Manufacturing Notes "Preserve Stacking Stripes Integrity during Router Tooling" at -255.32,-806.41 h39.37
Designator42: Bottom "4" at -19.38,-410.74 h78.74
Designator45: GND "2" at -186.5,-415.67 h78.74
Designator49: GND "3" at -96.81,-415.59 h78.74
FID1: Top Paste "STENCIL / FIDUCIAL / HALF-ETCHED" at -3326.14,-349.42 h30; Bottom Paste "STENCIL / FIDUCIAL / HALF-ETCHED" at -3006.14,-349.42 h30
FID2: Top Paste "STENCIL / FIDUCIAL / HALF-ETCHED" at 2761.16,4496.59 h30; Bottom Paste "STENCIL / FIDUCIAL / HALF-ETCHED" at 3081.16,4496.59 h30
FID3: Top Paste "STENCIL / FIDUCIAL / HALF-ETCHED" at 2755.49,-349.42 h30; Bottom Paste "STENCIL / FIDUCIAL / HALF-ETCHED" at 3075.49,-349.42 h30